# Altium PCB 遮挡式红外声光报警装置电路.PcbDoc
Units mm, origin at the board's own origin, x right, y up, seen from the top; angles counter-clockwise.
Board outline 152.4 x 101.6 mm, 2 copper layers (Top Layer, Bottom Layer); 16 components, 11 nets, 51 pads, 0 vias.
Unrouted connection lines stored in the file: 1.
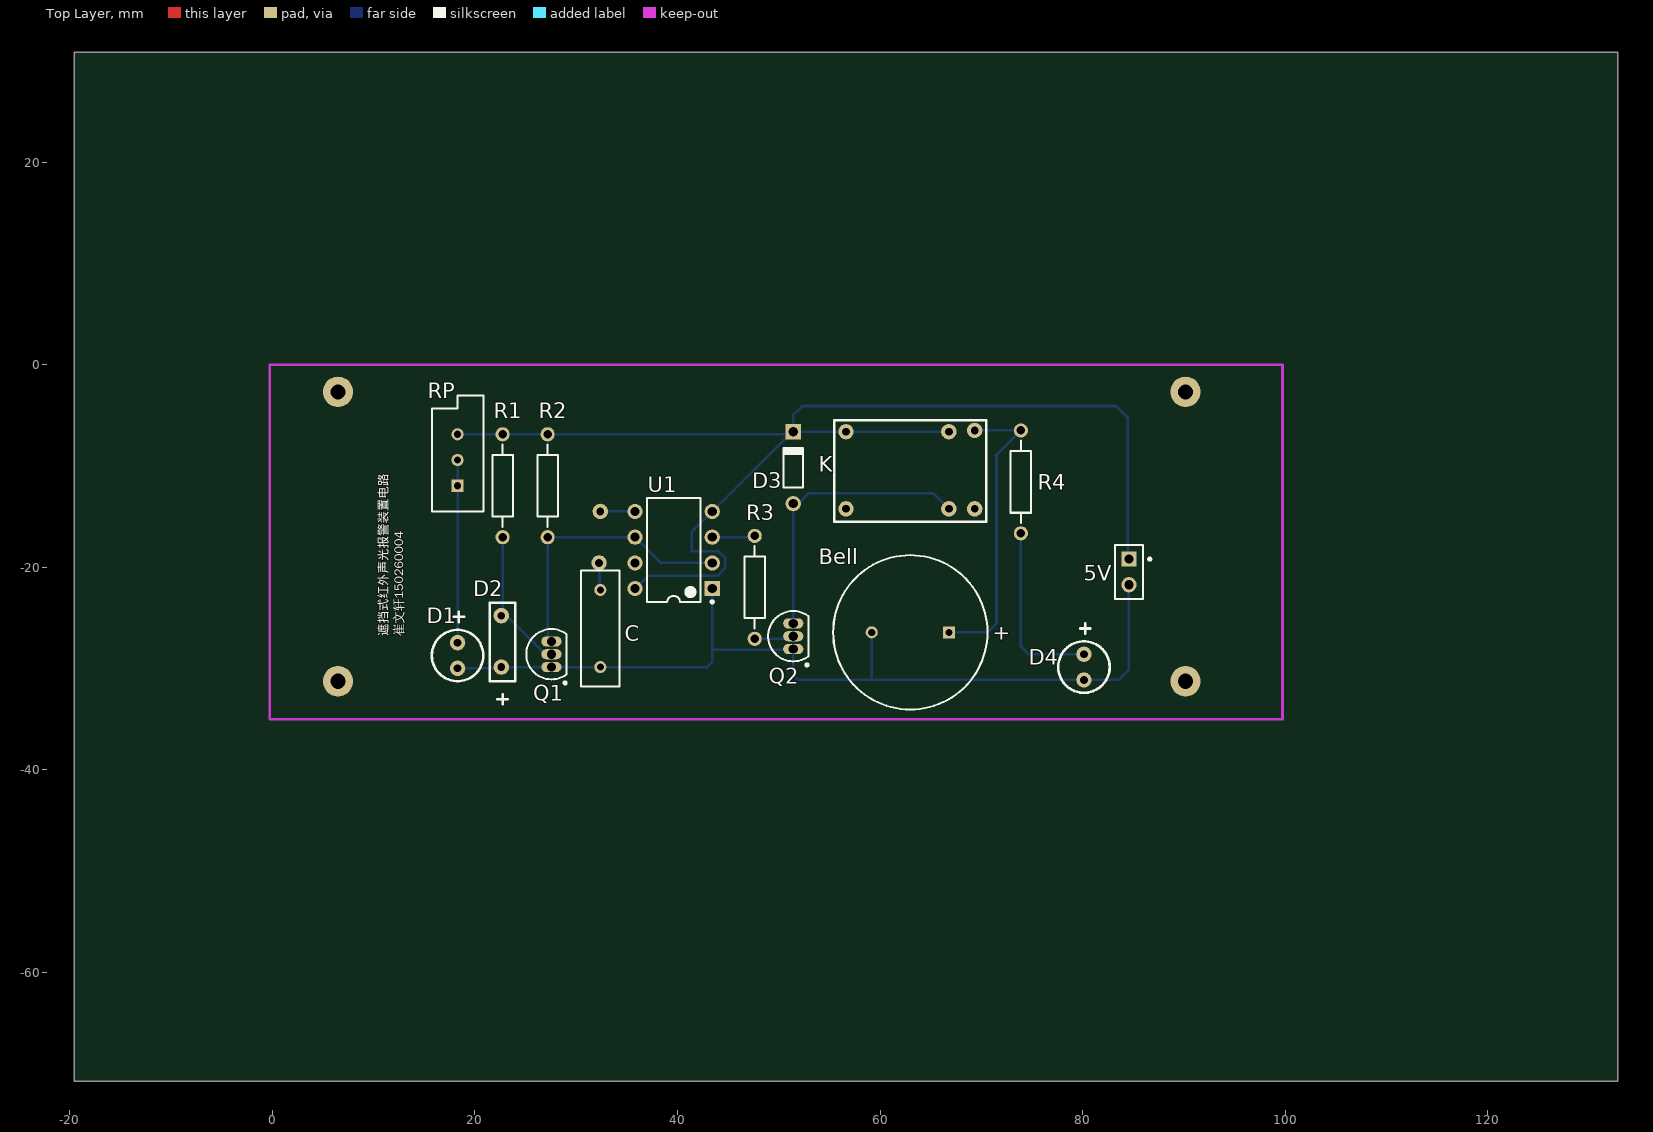
[diagram p0: Top Layer view]
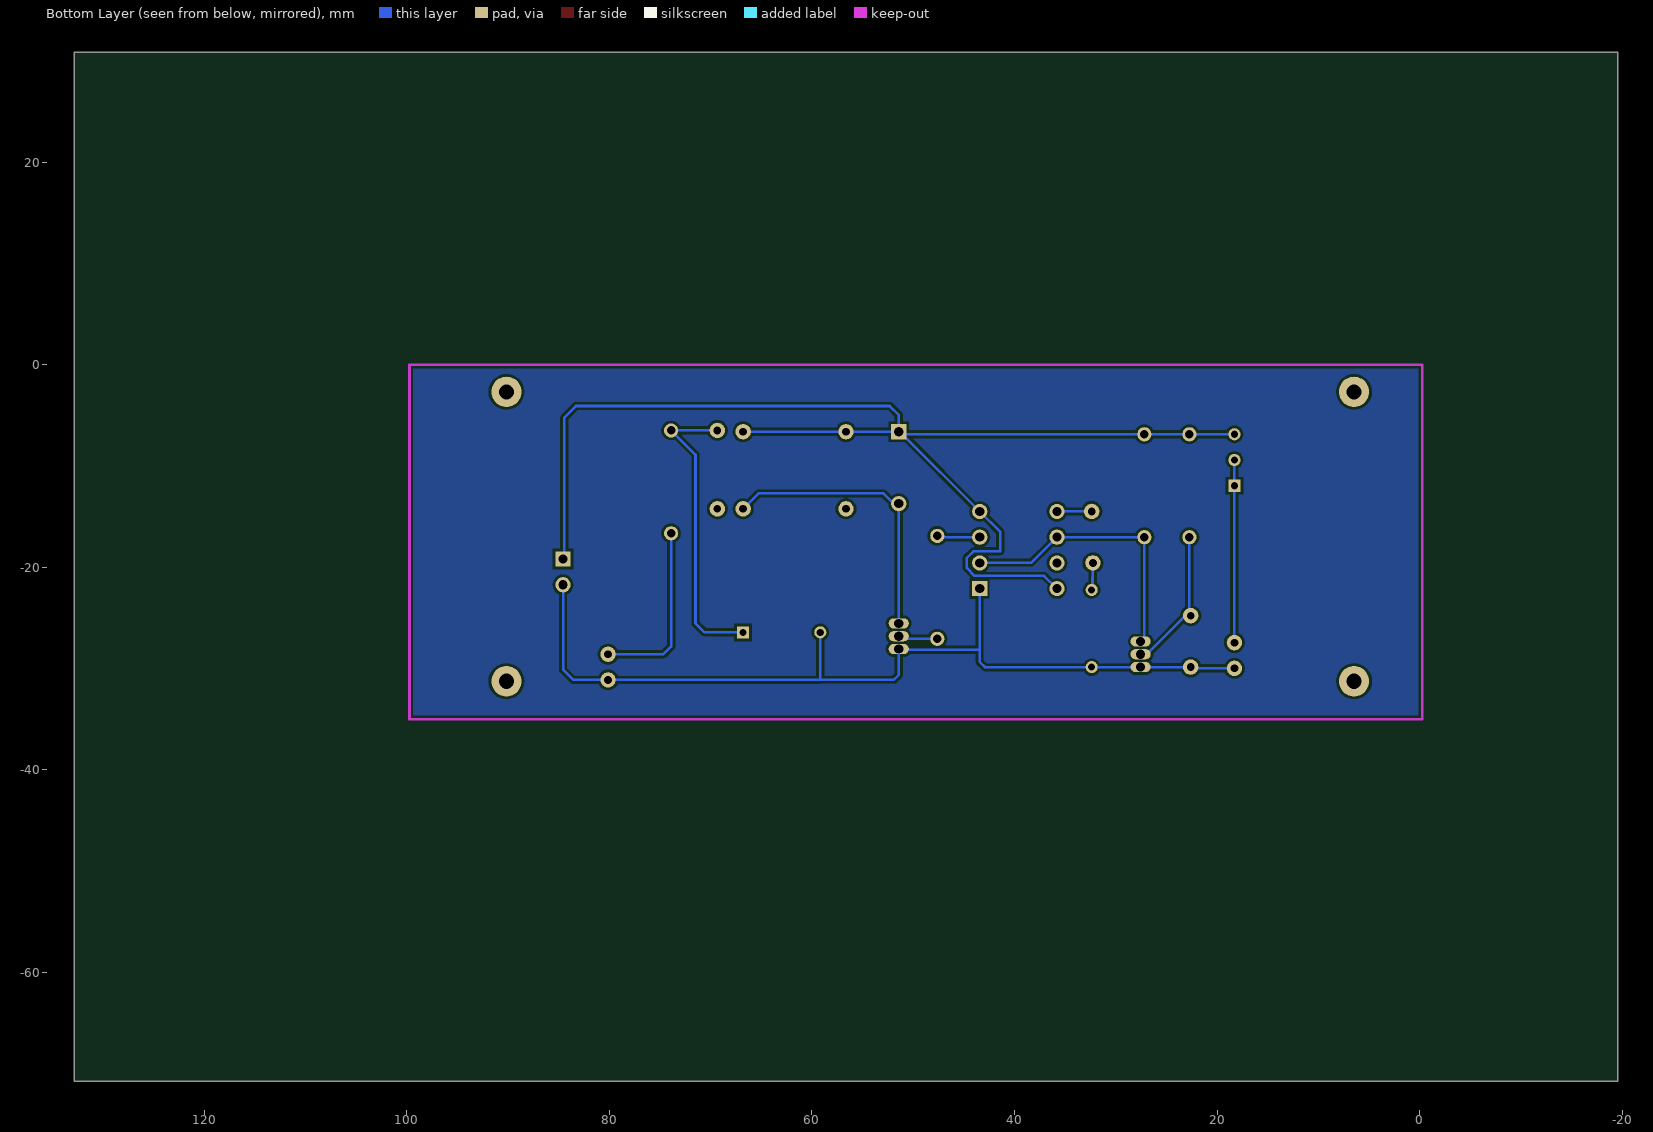
[diagram p1: Bottom Layer view, seen from below]

## Layer stack, top to bottom
Top Solder: solder mask 0.0102, Solder Resist, Dk 3.5
Top Layer: signal copper 0.0356
Dielectric 1: dielectric 0.32, FR-4, Dk 4.8
Bottom Layer: signal copper 0.0356
Bottom Solder: solder mask 0.0102, Solder Resist, Dk 3.5

## Board outline
-19.558,-70.739 132.842,-70.739 132.842,30.861 -19.558,30.861

## Design rules (kind name [scope] priority, off if disabled: settings)
Clearance [All] p1: gap=0.254 ignorepadtopadclearanceinfootprint=FALSE except(0: Arc-Hole Track-Hole SMDPad-Hole THPad-Hole Via-Hole Fill-Hole Poly-Hole Region-Hole Text-Hole)
PolygonConnect [All] p1: connectstyle=Relief reliefconductorwidth=0.254 reliefentries=4 polygonreliefangle="90 Angle" airgapwidth=0.254
RoutingVias [All] p1: holewidth=0.711 width=1.27 viastyle="Through Hole" minholewidth=0.711 minwidth=1.27 maxholewidth=0.711 maxwidth=1.27
SolderMaskExpansion [All] p1: expansion=0.102
Width [All] p1: maxlimit=0.254 minlimit=0.254 preferedwidth=0.254
30 further rules are at their usual default settings.

## Components (designator, comment, footprint, x,y, rotation, side; value= is the part's Value field where it differs from the comment)
5V "Battery" PIN2 84.582,-19.177 r270 top
Bell "Bell" RB7.6-15 62.992,-26.416 r0 top
C "Cap" RAD-0.3 32.385,-26.035 r270 top value=103
D1 "SF303" SE303 18.288,-27.432 r270 top
D2 "PH302" PH302 22.606,-29.845 r90 top
D3 "IN4148" DO-35 51.435,-10.16 r90 top
D4 "LED" SE303 80.137,-28.575 r270 top
K "Relay-SPST" K6 66.802,-6.604 r0 top
Q1 "9013" TO-92A 27.559,-28.575 r0 top
Q2 "9013" TO-92A 51.435,-26.797 r0 top
R1 "Res2" AXIAL-0.4 22.733,-11.938 r90 top value=20K
R2 "Res2" AXIAL-0.4 27.178,-11.938 r90 top value=56K
R3 "Res2" AXIAL-0.4 47.625,-21.971 r90 top value=2K
R4 "Res2" AXIAL-0.4 73.914,-11.557 r90 top value=510
RP "" VR5 18.288,-9.398 r90 top value=1K
U1 "NE555" DIP-8 39.624,-18.288 r180 top (schematic designator U?)

## Footprints (in the part's own frame and the unit in brackets; to place one, negate y for a bottom-side part, rotate by r counter-clockwise, add the part's x,y. Pads: shape width x height; smd on the part's side, far side on the other; paste and mask are expansions set on the pad)
AXIAL-0.4 [mm] "Axial Device, Thru-Hole; 2 Leads; 0.4 in Pin Spacing"
  round 1.4 hole 0.85: 1(-5.08,0) 2(5.08,0)
  silkscreen extent -4.06,-1.02 4.06,1.02
DIP-8 [mm] "DIP; 8 Leads; Row Spacing 7.62 mm; Pitch 2.54 mm"
  rect 1.5x1.5 hole 0.9: 1(-3.81,3.81)
  round 1.5 hole 0.9: 2(-3.81,1.27) 3(-3.81,-1.27) 4(-3.81,-3.81) 5(3.81,-3.81) 6(3.81,-1.27) 7(3.81,1.27) 8(3.81,3.81)
  silkscreen extent -3.94,-5.15 2.65,5.23, body extent -3.6,-5.15 3.6,5.15, height 5.08
DO-35 [mm] "Diode, Axial; Body 3.8 x 1.9 mm (LxDia. max), Lead Dia. 0.53 mm (max)"
  round 1.5 hole 0.9: 1(-3.55,0)
  rect 1.5x1.5 hole 0.9: 2(3.55,0)
  silkscreen extent -1.95,-0.95 2.05,0.95
K6 [mil]
  round 60 hole 30: 1(-400,0) 2(0,0) 3(100,5) 4(100,-300) 5(0,-300) 6(-400,-300)
  silkscreen extent -445,-350 146,45
PH302 [mil]
  round 60 hole 30: 1(0,0) 2(200,0)
  silkscreen extent -145,-55 250,45
PIN2 [mm] "Photosensitive Diode; 2 Leads"
  rect 1.5x1.5 hole 0.9: 1(0,0)
  round 1.5 hole 0.9: 2(2.54,0)
  silkscreen extent -1.4,-1.4 3.94,2.18
RAD-0.3 [mm] "Radial Cap, Thru-Hole; 2 Leads; 0.3 in Pin Spacing"
  round 1.2 hole 0.7: 1(-3.81,0) 2(3.81,0)
  silkscreen extent -5.71,-1.91 5.71,1.91
RB7.6-15 [mm] "Polarized Capacitor (Radial); 2 Leads"
  rect 1.2x1.2 hole 0.7: 1(3.81,0)
  round 1.2 hole 0.7: 2(-3.81,0)
  silkscreen extent -7.62,-7.62 7.62,7.62
SE303 [mil]
  round 60 hole 30: 1(0,0) 2(100,0)
  silkscreen extent -120,-100 150,100
TO-92A [mm] "TO, Flat Index; 3 In-Line, Axial Leads; Body Dia. 4.5mm; Leads 0.51 x 0.48 mm (max)"
  oval 2x1 hole 0.9: 1(0,-1.27) 2(0,0) 3(0,1.27)
  silkscreen extent -2.48,-2.95 1.5,2.48, body extent -2.48,-2.5 1.5,2.5, height 6.86
VR5 [mm] "Thru-Hole; 3 Leads"
  rect 1.2x1.2 hole 0.7: 1(-2.54,0)
  round 1.2 hole 0.7: 2(0,0) 3(2.54,0)
  silkscreen extent -5.08,-2.54 6.35,2.54

## Part data
5V: "Multicell Battery", LatestRevisionDate=17-Jul-2002, LatestRevisionNote="Re-released for DXP Platform.", PackageDescription="Battery; 2 Leads", PackageReference=BAT-2, Published=24-Mar-1999, Publisher="Altium Limited"
Bell: "Electrical Bell", LatestRevisionDate=17-Jul-2002, LatestRevisionNote="Re-released for DXP Platform.", PackageReference=PIN2, Published=24-Mar-1999, Publisher="Altium Limited"
C: "Capacitor", LatestRevisionDate=17-Jul-2002, LatestRevisionNote="Re-released for DXP Platform.", PackageDescription="Radial Cap, Thru-Hole; 2 Leads; 0.3 in Pin Spacing", PackageReference=RAD-0.3, Published=8-Jun-2000, Publisher="Altium Limited"
D1 D4: library part LED0, "Typical INFRARED GaAs LED", LatestRevisionDate=08-Jul-2005, LatestRevisionNote="Mech Layer 1 removed.", PackageDescription="LED; 2 Leads", PackageReference=LED-0, Published=8-Jun-2000, Publisher="Altium Limited"
D2: library part "Photo Sen", "Photosensitive Diode", LatestRevisionDate=17-Jul-2002, LatestRevisionNote="Re-released for DXP Platform.", PackageReference=PIN2, Published=24-Mar-1999, Publisher="Altium Limited"
D3: library part Diode, "Default Diode", Code_JEDEC=DO-214-AB, LatestRevisionDate=17-Jul-2002, LatestRevisionNote="Re-released for DXP Platform.", PackageDescription="DO-214-AB/SMC; 2 C-Bend Leads; Body 7.9 x 5.9 mm, inc. leads (LxW)", PackageReference=SMC, PackageVersion=Sep-1996, Published=8-Jun-2000, Publisher="Altium Limited"
K: "Single-Pole Single-Throw Relay", LatestRevisionDate=17-Jul-2002, LatestRevisionNote="Re-released for DXP Platform.", PackageReference=MODULE4, Published=24-Mar-1999, Publisher="Altium Limited"
Q1 Q2: library part QNPN, "NPN Bipolar Transistor", LatestRevisionDate=29-May-2009, LatestRevisionNote="IPC-7351 Footprint Added.", PackageDescription="3-Pin SOT-23 Package 0.95 mm Pitch, 2.4 mm Lead Span", PackageReference=SOT-23B, PackageVersion=Aug-1999, Published=8-Jun-2000, Publisher="Altium Limited"
R1 R2 R3 R4: "Resistor", LatestRevisionDate=17-Jul-2002, LatestRevisionNote="Re-released for DXP Platform.", PackageDescription="Axial Device, Thru-Hole; 2 Leads; 0.4 in Pin Spacing", PackageReference=AXIAL-0.4, Published=8-Jun-2000, Publisher="Altium Limited"
RP: library part RPot, "Potentiometer", LatestRevisionDate=17-Jul-2002, LatestRevisionNote="Re-released for DXP Platform.", PackageDescription="Variable Resistor, Thru-Hole; 3 Leads", PackageReference=VR5, Published=8-Jun-2000, Publisher="Altium Limited", Set Position=0.5, Sim Note="Enter the Resistance value and the set point into parameter fields."

## Free pads (board coordinates)
  round 3 hole 1.5: 1(6.477,-2.667) 2(90.17,-2.667) 3(90.169,-31.242) 4(6.477,-31.242)
  round 1.524 hole 0.762: 1(32.258,-19.558) 2(32.385,-14.478)

## Nets (pads, with @x,y where several pads share a name; then routed paths per layer and width w, separated by ;. In a path a pad name is that pad's centre, name@x,y a point inside that pad or via, vN(x,y) a via of type N, cw(c..) or ccw(c..) an arc to the next point about the centre after c; other vN are vias at no path point)
Net5V_1: 5V.1 D3.2 K.1 K.2 R1.2 R2.2 RP.3 U1.4 U1.8 | length 128.3
  Bottom Layer w0.254: RP.3 R1.2 R2.2 D3.2@51.054,-6.858 ; U1.8 37.084,-20.828 43.942,-20.828 44.704,-20.066 44.704,-19.05 44.069,-18.415 41.402,-18.415 41.402,-16.51 U1.4 D3.2@51.054,-6.858 ; K.2 K.1 56.636,-6.61 D3.2 D3.2@51.435,-6.483 ; 5V.1@84.455,-19.304 5V.1 84.455,-19.05 84.455,-5.207 83.312,-4.064 52.324,-4.064 51.435,-4.953 D3.2@51.435,-6.483 ; D3.2@51.054,-6.858 51.429,-6.483 D3.2@51.435,-6.483
Net5V_2: 5V.2 Bell.2 C.2 D1.2 D2.1 D4.2 Q1.1 Q2.1 U1.1 | length 90.1
  Bottom Layer w0.254: D1.2 22.479,-29.972 D2.1 Q1.1 C.2 42.926,-29.845 43.434,-29.337 43.434,-28.194 ; U1.1 43.434,-28.194 ; Q2.1 Q2.1@51.435,-28.132 ; 59.182,-31.115 Bell.2 ; 5V.2 84.582,-30.099 83.566,-31.115 D4.2 54.483,-31.115 51.943,-31.115 51.435,-30.607 Q2.1@51.435,-28.132 ; 43.434,-28.194 43.496,-28.132 Q2.1@51.435,-28.132
NetBell_1: Bell.1 K.3 R4.2 | length 29.7
  Bottom Layer w0.254: Bell.1 70.612,-26.416 71.501,-25.527 71.501,-8.89 R4.2 K.3
NetC_1: C.1 pad.1@32.258,-19.558 pad.2@32.385,-14.478 U1.5 | length 6.1
  Bottom Layer w0.254: pad.1@32.258,-19.558 C.1@32.304,-22.226 ; pad.2@32.385,-14.478 U1.5
NetD1_1: D1.1 RP.1 RP.2 | length 18.1
  Bottom Layer w0.254: D1.1@18.034,-27.432 18.288,-27.178 RP.1 RP.2
NetD2_2: D2.2 Q1.2 R1.1 | length 14.2
  Bottom Layer w0.254: D2.2 22.733,-24.638 R1.1 ; D2.2@22.86,-24.511 26.924,-28.575 Q1.2
NetD3_1: D3.1 K.5 Q2.3 | length 28.2
  Bottom Layer w0.254: Q2.3 D3.1 51.949,-13.71 52.959,-12.7 65.278,-12.7 K.5
NetD4_1: D4.1 R4.1 | length 17.7
  Bottom Layer w0.254: R4.1 73.914,-27.813 74.676,-28.575 D4.1
NetQ1_3: Q1.3 R2.1 U1.2 U1.6 | length 27.8
  Bottom Layer w0.254: Q1.3 27.178,-26.924 R2.1 U1.6 38.354,-19.558 U1.2
NetQ2_2: Q2.2 R3.1 | length 3.8
  Bottom Layer w0.254: R3.1 Q2.2@51.435,-27.051
NetR3_2: R3.2 U1.3 | length 4.2
  Bottom Layer w0.254: U1.3 47.498,-17.018 R3.2
pads on no net: K.4 K.6 U1.7

## Polygon pours and split planes (outlines as drawn)
no net on Bottom Layer (solid, pour order 14): -0.254,0 99.746,0 99.746,-34.925 99.671,-35 -0.254,-35
no net on Bottom Layer "Bottom Layer-No Net" (solid, pour order 10): 18.288,-37.338
Net5V_2 on Bottom Layer "Bottom Layer-Net5V_2 1" (hatched Horizontal grid 0.508 track 0.203, pour order 4): 35.179,-9.779

## Keep-outs
Keep-Out Layer:
  lines w0.254: -0.254,-35 99.746,-35 99.746,0 -0.254,0 -0.254,-35

## Silkscreen, mask and mechanical layers (free items; w line width, h text height)
Top Overlay:
  text "遮挡式红外声光报警装置电路 / 崔文轩150260004" at 13.208,-26.797 h1.52 r90

## Text inside footprints (layer, text, board x,y; h text height)
Bell: Top Overlay "+" at 71.124,-27.153 h1.5